# Altium PCB COMECA-TestPCB.PcbDoc
Units mil, origin at the board's own origin, x right, y up, seen from the top; angles counter-clockwise.
Board outline 2375 x 4400 mil, 2 copper layers (Top Layer, Bottom Layer); 20 components, 20 nets, 148 pads, 6 vias.
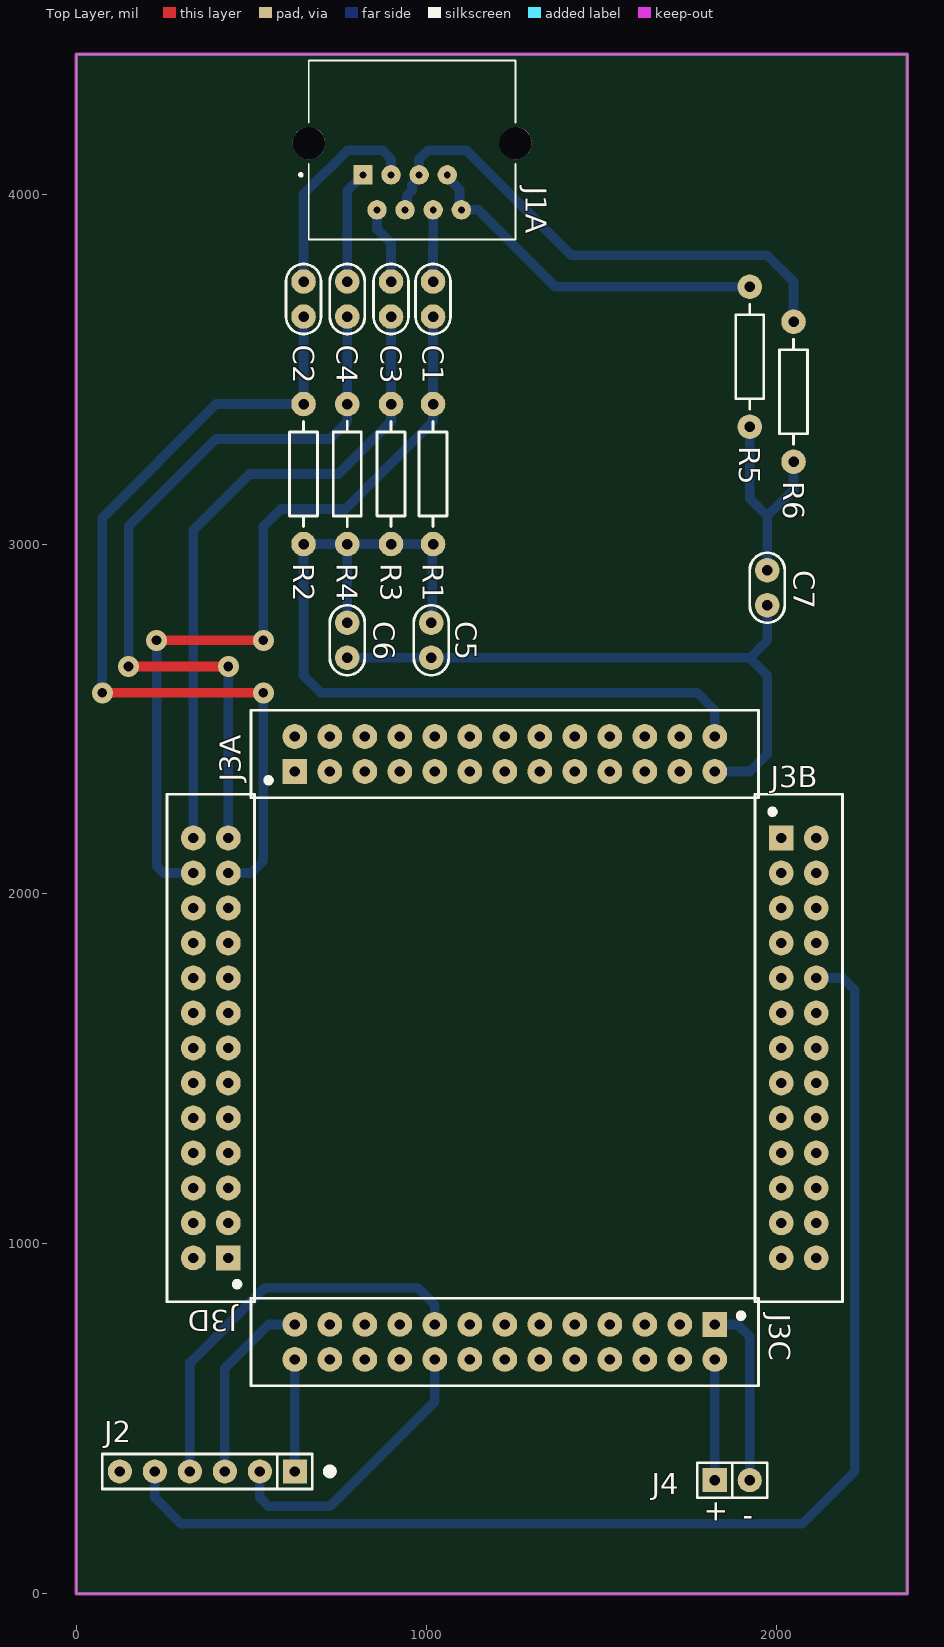
[diagram p0: Top Layer view]
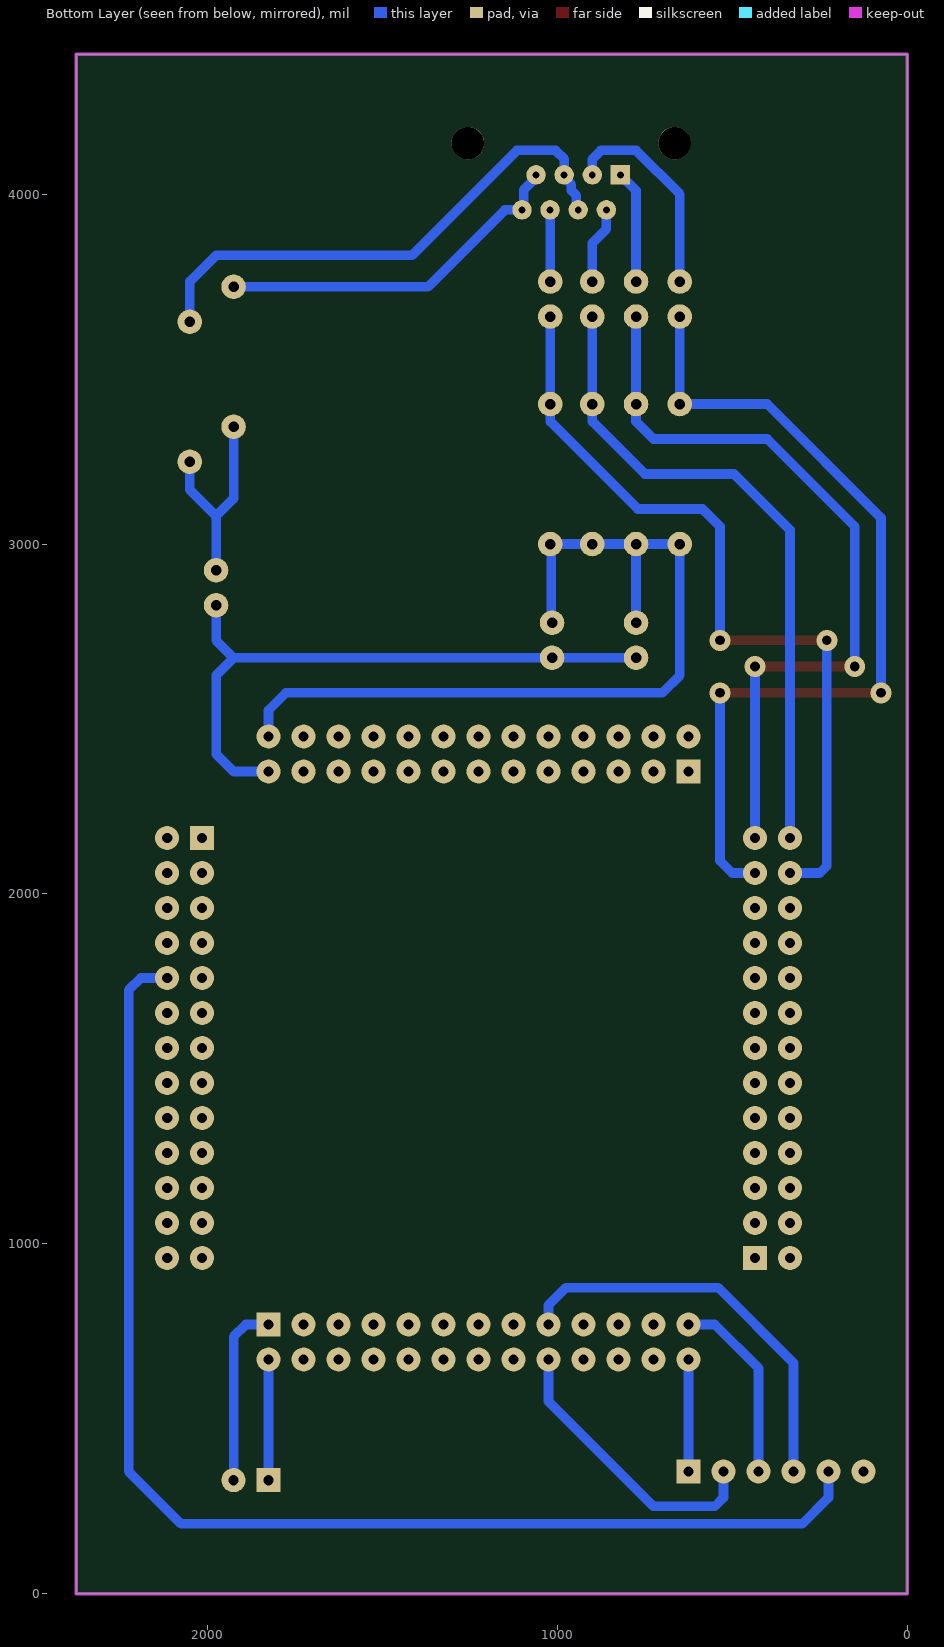
[diagram p1: Bottom Layer view, seen from below]

## Layer stack, top to bottom
Top Solder: solder mask 0.4, Solder Resist, Dk 3.5
Top Layer: signal copper 1.4
Dielectric 1: dielectric 12.6, FR-4, Dk 4.8
Bottom Layer: signal copper 1.4
Bottom Solder: solder mask 0.4, Solder Resist, Dk 3.5

## Board outline
0,0 2375,0 2375,4400 0,4400

## Design rules (kind name [scope] priority, off if disabled: settings)
Clearance [All] p1: gap=19.68 ignorepadtopadclearanceinfootprint=FALSE
PolygonConnect [All] p1: connectstyle=Relief reliefconductorwidth=10 reliefentries=4 polygonreliefangle="90 Angle" airgapwidth=10
RoutingVias [All] p1: holewidth=28 width=50 viastyle="Through Hole" minholewidth=28 minwidth=50 maxholewidth=28 maxwidth=70
SolderMaskExpansion [All] p1: expansion=4 istentingtop=FALSE
Width [All] p1: maxlimit=39.37 minlimit=19.68 preferedwidth=27.56
30 further rules are at their usual default settings.

## Components (designator, comment, footprint, x,y, rotation, side; value= is the part's Value field where it differs from the comment)
C1 "33nF" CAP100 1020,3700 r270 top
C2 "33nF" CAP100 650,3700 r270 top
C3 "33nF" CAP100 900,3700 r270 top
C4 "33nF" CAP100 775,3700 r270 top
C5 "100nF" CAP100 1015,2725 r270 top
C6 "100nF" CAP100 775,2725 r270 top
C7 "1000pFx2kV" CAP100 1975,2875 r270 top
J1A "RJ45" CUI_CRJ032-1-TH 960.24,4145.55 r180 top
J2 "PROGRAMADOR" SIP6 625,350 r180 top
J3A "SIP13" "SIP13*2 - HDR" 625,2350 r0 top
J3B "SIP13" "SIP13*2 - HDR" 2015,2160 r270 top
J3C "SIP13" "SIP13*2 - HDR" 1825,770 r180 top
J3D "SIP13" "SIP13*2 - HDR" 435,960 r90 top
J4 "VCC_EXT" SIP2 1875,325 r0 top
R1 "50" RES400 1020,3400 r270 top
R2 "50" RES400 650,3400 r270 top
R3 "50" RES400 900,3400 r270 top
R4 "50" RES400 775,3400 r270 top
R5 "75" RES400 1925,3335 r90 top
R6 "75" RES400 2050,3635 r270 top

## Footprints (in the part's own frame and the unit in brackets; to place one, negate y for a bottom-side part, rotate by r counter-clockwise, add the part's x,y. Pads: shape width x height; smd on the part's side, far side on the other; paste and mask are expansions set on the pad)
CAP100 [mil]
  round 70 hole 30: 1(-50,0) 2(50,0)
  silkscreen extent -100,-50 100,50, body extent -115,-33 115,34, height 241
CUI_CRJ032-1-TH [mm]
  rect 1.408x1.408 hole 0.5: 1(3.57,2.3)
  round 1.408 hole 0.5: 2(2.55,4.84) 3(1.53,2.3) 4(0.51,4.84) 5(-0.51,2.3) 6(-1.53,4.84) 7(-2.55,2.3) 8(-3.57,4.84)
  round 2.36 hole 2.36 unplated: ""(-7.5,0) ""(7.5,0)
  silkscreen extent -7.5,-6 8.17,7
RES400 [mil]
  round 70 hole 30: 1(0,0) 2(400,0)
  silkscreen extent 50,-40 350,40, body extent -12,-45 412,46, height 96
SIP2 [mm]
  rect 1.75x1.75 hole 0.75: 1(-1.27,0)
  round 1.75 hole 0.75: 2(1.27,0)
  silkscreen extent -2.54,-1.27 2.54,1.27
SIP6 [mm]
  rect 1.75x1.75 hole 0.75: 1(0,0)
  round 1.75 hole 0.75: 2(2.54,0) 3(5.08,0) 4(7.62,0) 5(10.16,0) 6(12.7,0)
  silkscreen extent -1.27,-1.27 13.97,1.27, body extent -1.27,-1.3 13.97,1.24, height 8.38
"SIP13*2 - HDR" [mm]
  rect 1.8x1.8 / inner rect 1.75x1.75 / far side rect 1.75x1.75 hole 0.75: 1(0,0)
  round 1.8 / inner round 1.75 / far side round 1.75 hole 0.75: 2(0,2.54) 3(2.54,0) 4(2.54,2.54) 5(5.08,0) 6(5.08,2.54) 7(7.62,0) 8(7.62,2.54) 9(10.16,0) 10(10.16,2.54) 11(12.7,0) 12(12.7,2.54) 13(15.24,0) 14(15.24,2.54) 15(17.78,0) 16(17.78,2.54) 17(20.32,0) 18(20.32,2.54) 19(22.86,0) 20(22.86,2.54) 21(25.4,0) 22(25.4,2.54) 23(27.94,0) 24(27.94,2.54) 25(30.48,0) 26(30.48,2.54)
  silkscreen extent -3.17,-1.91 33.65,4.44, body extent -1.52,-1.21 32,3.75, height 8.51

## Part data
C1 C2 C3 C4 C5 C6 C7: library part CAP
J1A: library part CRJ032-1-TH, "8P8C, Single Port, Horizontal, Unshielded, No LED, Through Hole, RJ45 Modular Connector", Package=None, Availability="In Stock", Check_prices=https://www.snapeda.com/parts/CRJ032-1-TH/CUI%20Devices/view-part/6363031/?ref=eda, CUI_purchase_URL=https://www.cuidevices.com/product/interconnect/connectors/modular-connectors/rj45-connectors/crj032-1-th?utm_source=snapeda.com&utm_medium=referral&utm_campaign=snapedaBOM, MF="CUI Devices", MP=CRJ032-1-TH, Price=None, Purchase-URL=https://pricing.snapeda.com/search/part/CRJ032-1-TH/?ref=eda, SnapEDA_Link=https://www.snapeda.com/parts/CRJ032-1-TH/CUI%20Devices/view-part/6363031/?ref=snap
J2: library part CON6
J3A J3B J3C J3D: library part CON13*2
J4: library part CON2
R1 R2 R3 R4 R5 R6: library part RES

## Via types
v1: diameter 60, hole 28, Top Layer to Bottom Layer, 6 vias

## Nets (pads, with @x,y where several pads share a name; then routed paths per layer and width w, separated by ;. In a path a pad name is that pad's centre, name@x,y a point inside that pad or via, vN(x,y) a via of type N, cw(c..) or ccw(c..) an arc to the next point about the centre after c; other vN are vias at no path point)
3V3: J2.1 J3C.26 | length 320
  Bottom Layer w27.56: J2.1 J3C.26
3V3-1: C5.1 C6.1 J3A.26 R1.2 R2.2 R3.2 R4.2 | length 2488.5
  Bottom Layer w27.56: C6.1 R4.2 ; C5.1 1017.5,2777.5 1017.5,2997.5 R1.2 R3.2 R4.2 ; J3A.26 1825,2525 1775,2575 700,2575 650,2625 R2.2 R4.2
COM1: J1A.7 J1A.8 R5.2 | length 1032
  Bottom Layer w27.56: J1A.7 1060.63,4047.46 1095.45,4012.63 1095.45,3960.33 J1A.8 1150,3955 1370,3735 R5.2
COM2: J1A.4 J1A.5 R6.1 | length 1504.9
  Bottom Layer w27.56: J1A.4 945.49,3960.33 945.49,3995.49 959.97,4009.97 959.97,4027.11 J1A.5@980.31,4047.46 ; J1A.5 980,4055.31 980,4100 1005,4125 1115,4125 1415,3825 1975,3825 2050,3750 R6.1
GND: J2.3 J3C.25 | length 546.8
  Bottom Layer w27.56: J2.3 425,645 550,770 J3C.25
GND-1: C5.2 C6.2 C7.2 J3A.25 | length 1787.1
  Bottom Layer w27.56: C6.2 C5.2 1925,2675 ; J3A.25 1925,2350 1975,2400 1975,2625 1925,2675 ; C7.2 1975,2725 1925,2675
GND_EXT: J3C.1 J4.2 | length 528
  Bottom Layer w27.56: J3C.1 1890,770 1925,735 J4.2 J4.2@1927.5,327.5
NetC1_1: C1.1 J1A.6 | length 205.2
  Bottom Layer w27.56: C1.1 1020,3850 1020.47,3850.47 J1A.6
NetC2_1: C2.1 J1A.3 | length 607.1
  Bottom Layer w27.56: C2.1 650,4000 775,4125 875,4125 900,4100 J1A.3
NetC3_1: C3.1 J1A.2 | length 221.6
  Bottom Layer w27.56: J1A.2 859.84,3900.16 900,3860 C3.1
NetC4_1: C4.1 J1A.1 | length 323.5
  Bottom Layer w27.56: C4.1 775,4010.31 J1A.1
NetC7_1: C7.1 R5.1 R6.2 | length 616.8
  Bottom Layer w27.56: R5.1 1925,3130 1975,3080 ; C7.1 1975,3080 ; R6.2 2050,3155 1975,3080
PA13: J2.4 J3C.17 | length 1174.8
  Bottom Layer w27.56: J2.4 325,660 540,875 975,875 1025,825 J3C.17
PA14: J2.2 J3C.18 | length 829.6
  Bottom Layer w27.56: J2.2 525,275 550,250 725,250 1025,550 J3C.18
RST: J2.5 J3B.10 | length 3667.7
  Bottom Layer w27.56: J2.5 225,275 300,200 2075,200 2225,350 2225,1725 2190,1760 J3B.10
RX+: C2.2 J3D.23 R2.1 | length 2514.1
  Top Layer w27.56: v1(75,2575) v1(535,2575)
  Bottom Layer w27.56: v1(75,2575) 75,3075 400,3400 R2.1 C2.2 ; J3D.23 500,2060 535,2095 v1(535,2575)
RX-: C1.2 J3D.24 R1.1 | length 2297.5
  Top Layer w27.56: v1(230,2725) v1(535,2725)
  Bottom Layer w27.56: v1(230,2725) 230,2080 250,2060 J3D.24 ; v1(535,2725) 535,3050 585,3100 770,3100 1020,3350 R1.1 C1.2
TX+: C4.2 J3D.25 R4.1 | length 2224.3
  Top Layer w27.56: v1(150,2650) v1(435,2650)
  Bottom Layer w27.56: v1(150,2650) 150,3050 400,3300 725,3300 775,3350 R4.1 C4.2 ; J3D.25 v1(435,2650)
TX-: C3.2 J3D.26 R3.1 | length 1873.4
  Bottom Layer w27.56: J3D.26 335,3040 495,3200 750,3200 900,3350 R3.1 C3.2
VCC_EXT: J3C.2 J4.1 | length 345
  Bottom Layer w27.56: J4.1 J3C.2
pads on no net: J1A. J2.6 J3A.1 J3A.2 J3A.3 J3A.4 J3A.5 J3A.6 J3A.7 J3A.8 J3A.9 J3A.10 J3A.11 J3A.12 J3A.13 J3A.14 J3A.15 J3A.16 J3A.17 J3A.18 J3A.19 J3A.20 J3A.21 J3A.22 J3A.23 J3A.24 J3B.1 J3B.2 J3B.3 J3B.4 J3B.5 J3B.6 J3B.7 J3B.8 J3B.9 J3B.11 J3B.12 J3B.13 J3B.14 J3B.15 J3B.16 J3B.17 J3B.18 J3B.19 J3B.20 J3B.21 J3B.22 J3B.23 J3B.24 J3B.25 J3B.26 J3C.3 J3C.4 J3C.5 J3C.6 J3C.7 J3C.8 J3C.9 J3C.10 J3C.11 J3C.12 J3C.13 J3C.14 J3C.15 J3C.16 J3C.19 J3C.20 J3C.21 J3C.22 J3C.23 J3C.24 J3D.1 J3D.2 J3D.3 J3D.4 J3D.5 J3D.6 J3D.7 J3D.8 J3D.9 J3D.10 J3D.11 J3D.12 J3D.13 J3D.14 J3D.15 J3D.16 J3D.17 J3D.18 J3D.19 J3D.20 J3D.21 J3D.22
copper on no net: | length 0

## Keep-outs
Keep-Out Layer:
  the board outline again, w10

## Silkscreen, mask and mechanical layers (free items; w line width, h text height)
Top Overlay:
  circle w19.68: c725,350 r10
  text "+" at 1855,200 h60 r90
  text "-" at 1905,195.01 h60